# Altium PCB MagControl.PcbDoc (part 2 of 2)
Units mil, origin at the board's own origin, x right, y up, seen from the top; angles counter-clockwise.
Board outline 3700 x 2900 mil, 4 copper layers (Top Layer, Layer 1, Layer 2, Bottom Layer), stack 61.756 mil thick; 68 components, 51 nets, 337 pads, 112 vias.
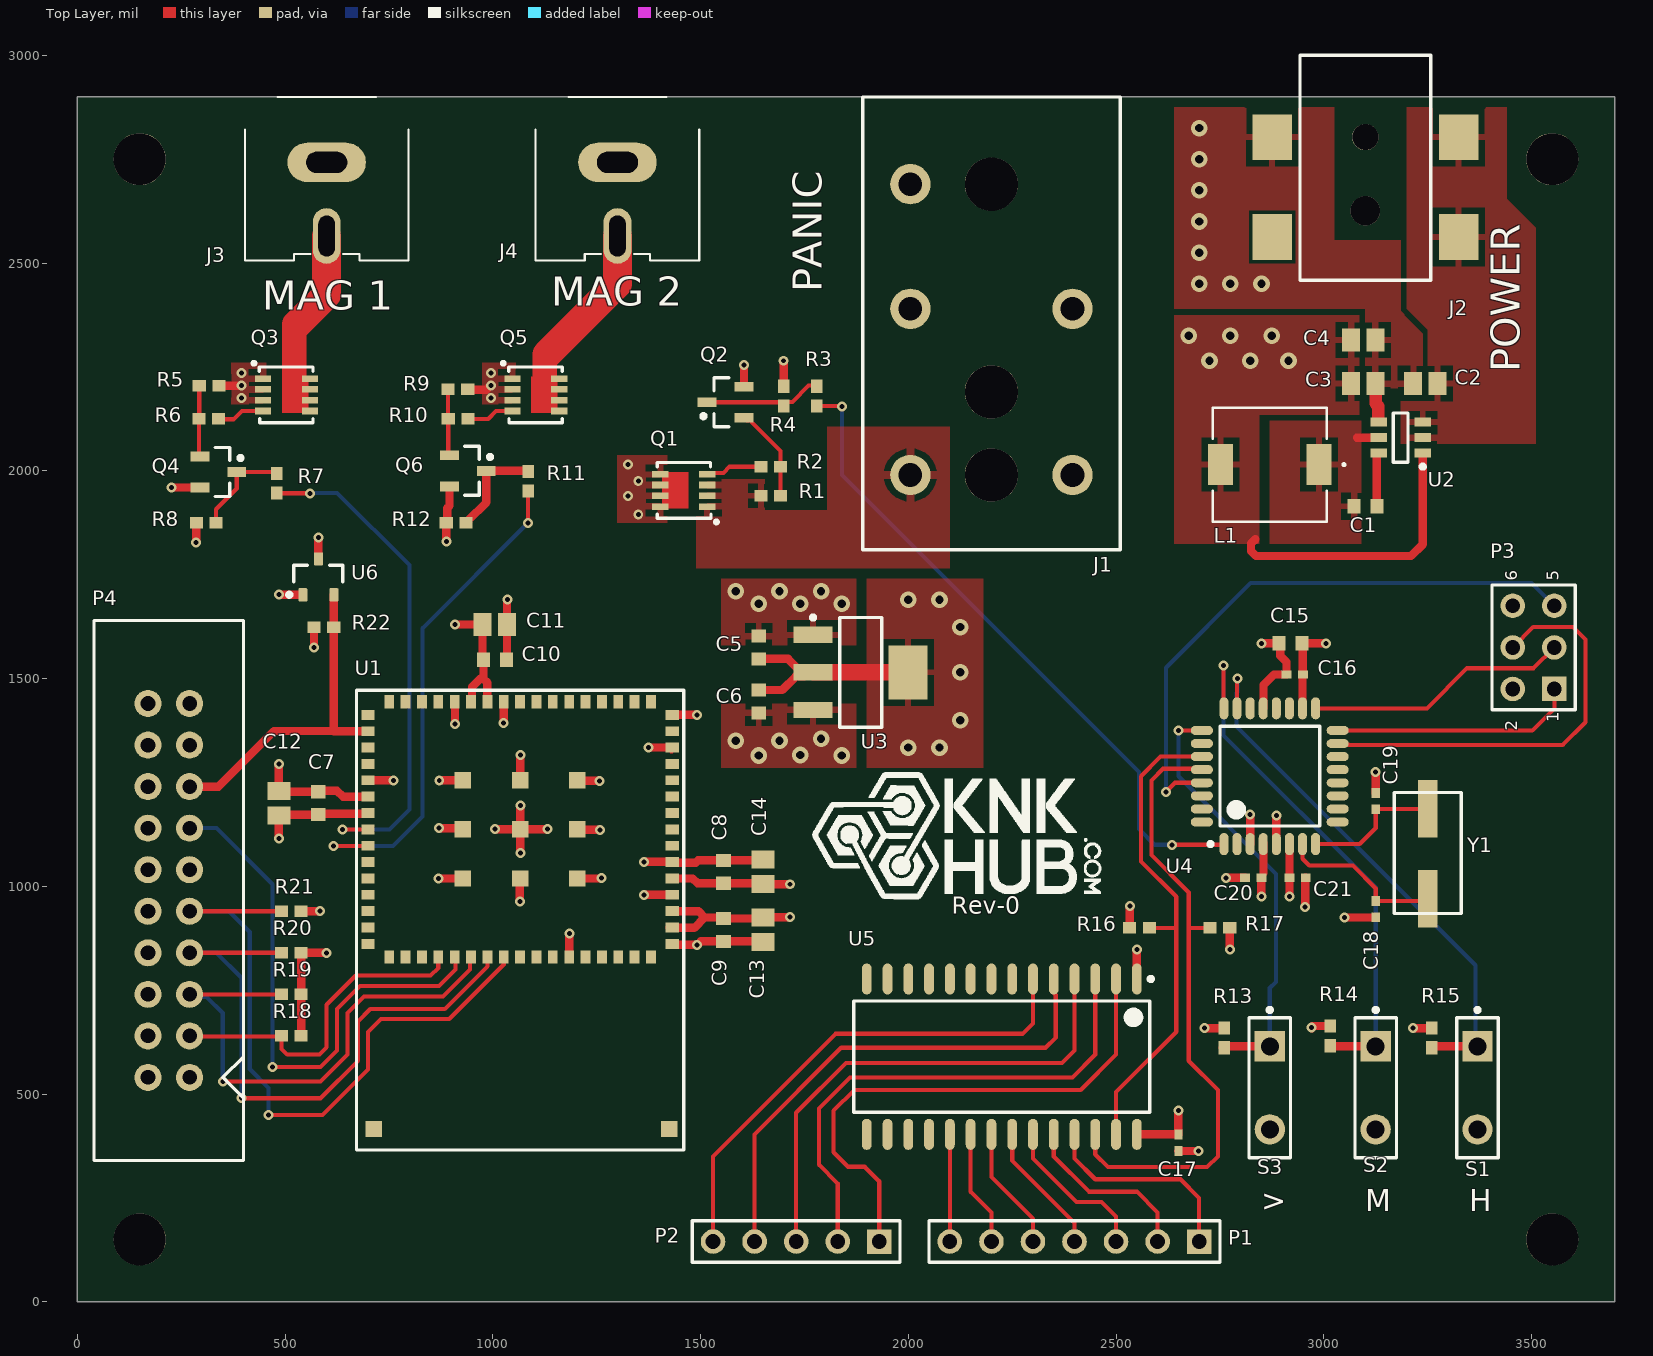
[diagram p0: Top Layer view]

## Part data (continued)
R18 R19 R20 R21 R22: library part R, "RES 1.00K OHM 1/10W 1% 0402 SMD", Case/Package=0402, Case Code (Metric)=1005, Manufacturer 1=Panasonic, Manufacturer Part Number 1=ERJ-2RKF1002X, Max Operating Temperature=155°C, Max Power Dissipation=100mW, Min Operating Temperature=-55°C, Package Quantity=1, Resistance=10kR, Supplier Part Number 1=P10.0KLCT-ND, Temperature Coefficient=100ppm/°C, Tolerance=1%, Voltage Rating=50V, Case Code (Imperial)=0402, ComponentLink1Description=https://datasheet.ciiva.com/11821/0900766b80f80784-11821171.pdf?src-supplier=RSComponents, ComponentLink1URL=https://datasheet.ciiva.com/11821/0900766b80f80784-11821171.pdf?src-supplier=RSComponents, ComponentLink2Description=https://datasheet.ciiva.com/17212/aoa0000ce2-17212102.pdf?src-supplier=Avnet+Europe, ComponentLink2URL=https://datasheet.ciiva.com/17212/aoa0000ce2-17212102.pdf?src-supplier=Avnet+Europe, ComponentLink3Description=https://datasheet.ciiva.com/28514/1678782-28514185.pdf?src-supplier=Element14, ComponentLink3URL=https://datasheet.ciiva.com/28514/1678782-28514185.pdf?src-supplier=Element14, ComponentLink4Description=https://datasheet.ciiva.com/43467/1678782-43467402.pdf?src-supplier=Farnell, ComponentLink4URL=https://datasheet.ciiva.com/43467/1678782-43467402.pdf?src-supplier=Farnell, ComponentLink5Description=https://datasheet.ciiva.com/27055/1987020-27055643.pdf?src-supplier=Jameco, ComponentLink5URL=https://datasheet.ciiva.com/27055/1987020-27055643.pdf?src-supplier=Jameco, ComponentLink6Description=https://datasheet.ciiva.com/48531/aoa0000ce2-48531069.pdf?src-supplier=Avnet, ComponentLink6URL=https://datasheet.ciiva.com/48531/aoa0000ce2-48531069.pdf?src-supplier=Avnet, ComponentLink7Description=https://datasheet.ciiva.com/30201/aoa0000ce2-30201022.pdf?src-supplier=Onlinecomponents.com, ComponentLink7URL=https://datasheet.ciiva.com/30201/aoa0000ce2-30201022.pdf?src-supplier=Onlinecomponents.com, ComponentLink8Description=https://datasheet.ciiva.com/16199/aoa0000ce2-16199478.pdf?src-supplier=Future+Electronics, ComponentLink8URL=https://datasheet.ciiva.com/16199/aoa0000ce2-16199478.pdf?src-supplier=Future+Electronics, ComponentLink9Description=https://datasheet.ciiva.com/24023/aoa0000ce2-24023017.pdf?src-supplier=Mouser, ComponentLink9URL=https://datasheet.ciiva.com/24023/aoa0000ce2-24023017.pdf?src-supplier=Mouser, ComponentLink10Description=https://datasheet.ciiva.com/9194/aoa0000ce2-9194142.pdf?src-supplier=Avnet, ComponentLink10URL=https://datasheet.ciiva.com/9194/aoa0000ce2-9194142.pdf?src-supplier=Avnet, ComponentLink11Description=https://datasheet.ciiva.com/16782/70260748-16782590.pdf?src-supplier=Allied+Electronics, ComponentLink11URL=https://datasheet.ciiva.com/16782/70260748-16782590.pdf?src-supplier=Allied+Electronics, ComponentLink12Description=https://datasheet.ciiva.com/16786/70260748-16786734.pdf?src-supplier=Allied+Electronics, ComponentLink12URL=https://datasheet.ciiva.com/16786/70260748-16786734.pdf?src-supplier=Allied+Electronics, Composition="Thick Film", Contact Plating=Tin, Depth=0.5mm, Features="Automotive AEC-Q200", Height=0.35mm, Lead Free="Lead Free", Length=1mm, Military Standard=Not, Mount="Surface Mount", Number of Pins=2, Number of Terminations=2, Packaging="Tape and Reel", Power Rating=100mW, Radiation Hardening=No, REACH SVHC="No SVHC", Supplier 1=Digi-Key, Termination=SMD/SMT, Voltage Rating (DC)=50V, Width=0.02inch
S1 S2 S3: library part SW-PB, "Switch", LatestRevisionDate=17-Jul-2002, LatestRevisionNote="Re-released for DXP Platform.", PackageDescription="Switch; 2 Leads", PackageReference=SPST-2, Published=24-Mar-1999, Publisher="Altium Limited"
U1: library part PARTICLE_P1, "P1 WI-FI MODULE", Manufacturer 1=Particle, Manufacturer Part Number 1=P1REEL, Supplier Part Number 1=1878-1020-1-ND, Supplier 1=Digi-Key
U2: library part AP63205, "IC REG BUCK 5V 2A TSOT26", Manufacturer 1=Diodes, Manufacturer Part Number 1=AP63205WU-7, Supplier Part Number 1=AP63205WU-7DICT-ND, Supplier 1=Digi-Key
U3: library part LM3940, "IC REG LDO 1A 5V SOT-223", Case/Package=SOT-223, Dropout Voltage=500mV, Manufacturer 1="TI National Semiconductor", Manufacturer Part Number 1=LM3940IMPX-3.3/NOPB, Max Input Voltage=7.5V, Max Operating Temperature=125°C, Max Output Current=1A, Min Input Voltage=4.5V, Min Operating Temperature=-40°C, Output Voltage=3.3V, Package Quantity=2000, Quiescent Current=15mA, Supplier Part Number 1=LM3940IMPX-3.3/NOPBCT-ND, ComponentLink1Description=https://datasheet.ciiva.com/12956/snvs114d-80171-12956736.pdf?src-supplier=Mouser, ComponentLink1URL=https://datasheet.ciiva.com/12956/snvs114d-80171-12956736.pdf?src-supplier=Mouser, ComponentLink2Description=https://datasheet.ciiva.com/27051/1282919-27051818.pdf?src-supplier=Jameco, ComponentLink2URL=https://datasheet.ciiva.com/27051/1282919-27051818.pdf?src-supplier=Jameco, ComponentLink3Description=https://datasheet.ciiva.com/3225/lm3940-3225415.pdf?src-supplier=Avnet, ComponentLink3URL=https://datasheet.ciiva.com/3225/lm3940-3225415.pdf?src-supplier=Avnet, ComponentLink4Description=https://datasheet.ciiva.com/6591/lm3940-6591738.pdf?src-supplier=Digi-Key, ComponentLink4URL=https://datasheet.ciiva.com/6591/lm3940-6591738.pdf?src-supplier=Digi-Key, ComponentLink5Description=https://datasheet.ciiva.com/26811/getdatasheetpartid-127471-26811034.pdf?src-supplier=Verical, ComponentLink5URL=https://datasheet.ciiva.com/26811/getdatasheetpartid-127471-26811034.pdf?src-supplier=Verical, ComponentLink6Description=https://datasheet.ciiva.com/6591/lm3940-6591740.pdf?src-supplier=Digi-Key, ComponentLink6URL=https://datasheet.ciiva.com/6591/lm3940-6591740.pdf?src-supplier=Digi-Key, ComponentLink7Description=https://datasheet.ciiva.com/6591/lm3940-6591742.pdf?src-supplier=Digi-Key, ComponentLink7URL=https://datasheet.ciiva.com/6591/lm3940-6591742.pdf?src-supplier=Digi-Key, Contact Plating=Tin, Lead Free="Lead Free", Mount="Surface Mount", Number of Outputs=1, Number of Pins=4, Number of Regulators=1, Output Current=1A, Output Type=Fixed, Packaging="Tape and Reel", Polarity=Positive, Radiation Hardening=No, Supplier 1=Digi-Key
U4: library part CMP-0095-00269-2, "8-bit AVR Microcontroller, 32KB Flash, 1KB EEPROM, 2KB SRAM, 32-pin TQFP, Industrial Grade (-40°C to 85°C)", Case/Package=A, Frequency=20MHz, Manufacturer 1="Microchip / Atmel", Manufacturer Part Number 1=ATMEGA328P-AU, Max Operating Temperature=85°C, Max Supply Voltage=5.5V, Min Operating Temperature=-40°C, Min Supply Voltage=1.8V, Package Quantity=250, Supplier Part Number 1=ATMEGA328P-AU-ND, Code_JEDEC=MS-026-ABA, ComponentLink1Description="Manufacturer URL", ComponentLink1URL=http://www.atmel.com/, ComponentLink2Description="ATmega48A/48PA/88A/88PA/168A/168PA/328/328P Datasheet", ComponentLink2URL=http://www.atmel.com/dyn/resources/prod_documents/doc8271.pdf, ComponentLink3Description="ATmega48A/48PA/88A/88PA/168A/168PA/328/328P Summary", ComponentLink3URL=http://www.atmel.com/dyn/resources/prod_documents/8271S.pdf, ComponentLink4Description=https://datasheet.ciiva.com/1166/doc8161-1166860.pdf?src-supplier=Newark, ComponentLink4URL=https://datasheet.ciiva.com/1166/doc8161-1166860.pdf?src-supplier=Newark, ComponentLink5Description=https://datasheet.ciiva.com/29119/155196-da-01-en-microcontr-atmega328p-au-8bit-tqfp-32-29119594.pdf?src-supplier=Conrad, ComponentLink5URL=https://datasheet.ciiva.com/29119/155196-da-01-en-microcontr-atmega328p-au-8bit-tqfp-32-29119594.pdf?src-supplier=Conrad, ComponentLink6Description=https://datasheet.ciiva.com/15213/getdatasheetpartid-365828-15213131.pdf?src-supplier=Verical, ComponentLink6URL=https://datasheet.ciiva.com/15213/getdatasheetpartid-365828-15213131.pdf?src-supplier=Verical, ComponentLink7Description=https://datasheet.ciiva.com/1157/1693866-1157693.pdf?src-supplier=Element14, ComponentLink7URL=https://datasheet.ciiva.com/1157/1693866-1157693.pdf?src-supplier=Element14, Core Architecture=AVR, Data Bus Width=8b, DatasheetVersion="revD, May-2011", Height=1.05mm, Interface=I2C, Lead Free="Lead Free", Length=7mm, Max Frequency=20MHz, Memory Size=32KB, Memory Type=FLASH, Mount="Surface Mount", Number of ADC Channels=8, Number of I2C Channels=1, Number of I/Os=23, Number of Pins=32, Number of Programmable I/O=23, Number of PWM Channels=6, Number of SPI Channels=1, Number of Timers/Counters=3, Oscillator Type=Internal, PackageDescription="32-Lead, 7x7x1.0 mm Body, 0.8mm Lead Pitch, Thin Profile Plastic Quad Flat Package (TQFP)", PackageReference=32A, PackageVersion="revC, Oct-2010", Packaging=Tray, Peripherals="Brown-out Detect/Reset", Radiation Hardening=No, RAM Size=2KB, REACH SVHC="No SVHC", RevisionNote="DatasheetVersion & PackageVersion updated. URLs added.", Supplier 1=Digi-Key, Watchdog Timer=Yes, Width=7mm
U5: library part HT16K33_28, "LED Matrix Driver"
U6: library part TLV803SDBZR, "Voltage Supervisor with Active-Low, Open Drain Reset, 1 Supply Monitored, -40 to 125 degC, 3-pin SOT-23 (DBZ), Green (RoHS & no Sb/Br)", Case/Package=SOT-23, Manufacturer="Texas Instruments", Max Operating Temperature=125°C, Max Reset Threshold Voltage=2.99V, Max Supply Current=30uA, Max Supply Voltage=6V, Min Operating Temperature=-40°C, Min Reset Threshold Voltage=2.87V, Min Supply Voltage=1.1V, Number of Voltages Monitored=1, Operating Supply Current=20uA, Quiescent Current=9uA, Rating=Catalog, Supplier Part Number 1=296-29196-1-ND, Threshold Voltage=2.93V, Threshold Voltage 1 (typ)(Typ)(V)=2.93, # of Supplies Monitored=1, Code_JEDEC=TO-236-AB, ComponentLink1Description=Datasheet, ComponentLink1URL=http://www.ti.com/general/docs/lit/getliterature.tsp?genericPartNumber=TLV803S&fileType=pdf, ComponentLink2Description=https://datasheet.ciiva.com/15105/getdatasheetpartid-544055-15105605.pdf?src-supplier=Verical, ComponentLink2URL=https://datasheet.ciiva.com/15105/getdatasheetpartid-544055-15105605.pdf?src-supplier=Verical, ComponentLink3Description=https://datasheet.ciiva.com/14203/tlv863m-14203548.pdf?src-supplier=Avnet, ComponentLink3URL=https://datasheet.ciiva.com/14203/tlv863m-14203548.pdf?src-supplier=Avnet, ComponentLink4Description=https://datasheet.ciiva.com/1979/tlv803m-1979837.pdf?src-supplier=Digi-Key, ComponentLink4URL=https://datasheet.ciiva.com/1979/tlv803m-1979837.pdf?src-supplier=Digi-Key, ComponentLink5Description=https://datasheet.ciiva.com/1979/tlv803m-1979838.pdf?src-supplier=Digi-Key, ComponentLink5URL=https://datasheet.ciiva.com/1979/tlv803m-1979838.pdf?src-supplier=Digi-Key, ComponentLink6Description=https://datasheet.ciiva.com/1979/tlv803m-1979839.pdf?src-supplier=Digi-Key, ComponentLink6URL=https://datasheet.ciiva.com/1979/tlv803m-1979839.pdf?src-supplier=Digi-Key, ComponentLink7Description=https://datasheet.ciiva.com/26070/sbvs157b-26070047.pdf?src-supplier=Avnet+Europe, ComponentLink7URL=https://datasheet.ciiva.com/26070/sbvs157b-26070047.pdf?src-supplier=Avnet+Europe, DatasheetVersion=SBVS157B, Iq(Typ)(uA)=9, Lead Free="Lead Free", Manufacturer 1="Texas Instruments", Manufacturer Part Number 1=TLV803SDBZR, Mount="Surface Mount", Mounting Technology="Surface Mount", Nominal Supply Current=30uA, Number of Elements=1, Number of Pins=3, Output Driver Type / Reset Output="Active-low, Open-drain", PackageDescription="3-Pin Plastic Small-Outline Package, 0.95 mm Pitch, 2.4 mm Lead Span", Package Quantity=1, PackageReference=DBZ0003A, PackageVersion="revB, Apr-2005", Packaging="Tape and Reel", PartNumber=TLV803SDBZR, Pricing 1="1=0.61000, 10=0.53400, 100=0.40910, 500=0.32342, 1000=0.25874 (USD)", Radiation Hardening=No, REACH SVHC="No SVHC", Reset="Active Low", Reset Threshold Accuracy(%)=2, Reset Timeout=120ms, RoHS=Yes, Stock 1=66193, SubFamily="Supervisor and Reset IC", Supplier 1=Digi-Key, Time Delay(ms)=200, Type="Simple Reset/Power-On Reset", VCC(Max)(V)=6, VCC(Min)(V)=1.1, Watchdog Timer=No
Y1: library part CRYSTAL, "CRYSTAL", ESR (Equivalent Series Resistance)=50R, Frequency=16MHz, Frequency Stability=50ppm, Frequency Tolerance=30ppm, Load Capacitance=20pF, Manufacturer 1="ECS International", Manufacturer Part Number 1=ECS-160-20-3X-EN-TR, Max Operating Temperature=85°C, Min Operating Temperature=-40°C, Package Quantity=1, Supplier Part Number 1=XC1793CT-ND, ComponentLink1Description=https://datasheet.ciiva.com/852/csm-3x-852506.pdf?src-supplier=Digi-Key, ComponentLink1URL=https://datasheet.ciiva.com/852/csm-3x-852506.pdf?src-supplier=Digi-Key, ComponentLink2Description=https://datasheet.ciiva.com/852/csm-3x-852507.pdf?src-supplier=Digi-Key, ComponentLink2URL=https://datasheet.ciiva.com/852/csm-3x-852507.pdf?src-supplier=Digi-Key, ComponentLink3Description=https://datasheet.ciiva.com/852/csm-3x-852508.pdf?src-supplier=Digi-Key, ComponentLink3URL=https://datasheet.ciiva.com/852/csm-3x-852508.pdf?src-supplier=Digi-Key, Height=0.091inch, Lead Free="Lead Free", Length=0.276inch, Mount="Surface Mount", Packaging="Tape and Reel", Supplier 1=Digi-Key, Termination=SMD/SMT, Tolerance=30ppm, Width=0.161inch

## Free pads (board coordinates)
  round 125 hole 125 unplated: ""(150,150) ""(150,2750) ""(3550,150) ""(3550,2750)

## Via types
v1: diameter 24, hole 12, Top Layer to Bottom Layer, 79 vias
v2: diameter 40, hole 20, Top Layer to Bottom Layer, 33 vias

## Nets (pads, with @x,y where several pads share a name; then routed paths per layer and width w, separated by ;. In a path a pad name is that pad's centre, name@x,y a point inside that pad or via, vN(x,y) a via of type N, cw(c..) or ccw(c..) an arc to the next point about the centre after c; other vN are vias at no path point)
3V3: C6.2 C7.2 C8.2 C9.2 C10.2 C11.2 C12.2 C13.2 C14.2 P4.1 R18.2 R19.2 R20.2 R22.2 U1.2 U1.3 U1.5 U1.26 U1.27 U1.38 U3.3 U6.3 | length 1662.8
  Top Layer w20: v1(485,1294.57) C12.2 486.97,1227.56 C7.2 582.44,1230 625,1230 639.17,1215.83 U1.38 ; R18.2 R19.2 R20.2 v1(600,840) ; R22.2 569.76,1575.24 v1(570,1575) ; U6.3 v1(580,1840) ; v1(909,1630) C11.2 975,1547.44 C10.2 977.44,1499.45 ; U1.27 949.17,1444.17 950,1445 950,1480 969.45,1499.45 977.44,1499.45 ; U1.26 986.89,1490 977.44,1499.45 ; U1.2 1425.87,900.87 1425,900 1485,900 1510,925 ; U1.3 1494.76,940.24 1510,925 ; U1.5 1481.02,1018.98 1492.56,1007.44 C8.2 1648.03,1007.44 C14.2 1650.47,1005 v1(1715,1005) ; v1(1715,925.63) 1650.63,925.63 C13.2 1647.56,922.56 C9.2 1552.56,925 1510,925
  other v2: 1640,1315 1840,1315 1740,1316 1585,1350 1690,1350 1790,1355
5V: C3.2 C4.2 C5.2 C15.2 C16.2 C17.2 C20.2 C21.2 J1.S L1.2 P3.2 R16.2 R17.2 S1.2 S2.2 S3.2 U2.1 U3.1 U4.4 U4.6 U4.18 U5.28 | length 1411.5
  Top Layer w20: R16.2 2532,900 2535,903 2533,905 v1(2533,953) ; U5.28 C17.2@2649.84,402.99 ; C17.2 2650,402.83 C17.2@2649.84,402.99 ; v1(2650,460) 2649.84,459.84 C17.2@2649.84,402.99 ; R17.2 2773.62,848.38 v1(2774,848) ; 2835,1835 2825,1825 2825,1806.72 2836.72,1795 3210,1795 3238.15,1823.15 U2.1 ; C20.2 2849.69,975.31 v1(2850,975) ; U4.4 2854.25,1104.25 U4.4@2854.57,1104.57 ; 2855,1032.11 2855,1083.95 2854.57,1084.38 U4.4@2854.57,1104.57 ; U4.4@2855,1105 U4.4@2854.57,1104.57 ; v1(2917.24,975) C21.2 U4.6 ; U4.18 2948.74,1509.84 2948.9,1510 C16.2 2949.69,1582.87 C15.2 v1(3005,1585)
  other v2: 1640,1680 1740,1680 1840,1680 1585,1710 1690,1710 1790,1710 2725,2265 2822.76,2265 2915,2265 2675,2325 2775,2325 2875,2325
12V: C2.2 J2.1 U2.2 U2.3
GND: C2.1 C3.1 C4.1 C5.1 C6.1 C7.1 C8.1 C9.1 C10.1 C11.1 C12.1 C13.1 C14.1 C15.1 C16.1 C17.1 C18.1 C19.1 C20.1 C21.1 J2.2 J3.1 J4.1 P3.6 P4.4 P4.6 P4.8 P4.10 P4.11 P4.12 P4.14 P4.16 P4.18 P4.20 Q2.2 Q4.2 Q6.2 R4.1 R8.1 R12.1 R13.1 R14.1 R15.1 R21.2 U1.1 U1.4 U1.6 U1.13 U1.15 U1.25 U1.28 U1.37 U1.39 U1.59 U1.65 U1.66 U1.67 U1.68 U1.69 U1.70 U1.71 U1.72 U1.73 U2.4 U3.2 U3.4 U4.3 U4.5 U4.21 U5.1 U6.1 | length 4017.9
  Top Layer w20: v1(226,1960) Q4.2 ; v1(286,1827) 286.38,1827.38 R8.1 ; v1(485,1115) C12.1 ; v1(485,1702) 485.31,1701.69 U6.1 ; R21.2 583.76,940 v1(584,940.24) ; U1.39 698.03,1175 582.56,1175 C7.1 486.97,1172.44 C12.1 ; U1.37 760.8,1255.2 v1(761,1255) ; v1(868.78,1018.98) U1.71 ; v1(870,1140) 928,1140 927.83,1139.83 U1.72 ; v1(871,1255.2) U1.73 ; v1(888,1830) 887.76,1830.24 R12.1 890,1877.24 890,1910 895.71,1915.71 Q6.2 ; U1.28 909,1443.32 v1(909,1391) ; v1(1005,1138) 1005.91,1137.09 U1.69 ; v1(1026,1393) 1026.26,1393.26 U1.25 ; C10.1 1034.06,1546.5 C11.1 1034.06,1689.06 v1(1035,1690) ; v1(1065,964) 1065,1009 1065.63,1009.63 U1.68 ; U1.70 1065.63,1315.63 v1(1066,1316) ; v1(1066,1080) 1066,1131.46 1065,1132.46 1066,1133.46 1064,1135.46 U1.69 ; v1(1066,1195) 1066,1142.72 1063,1139.72 U1.69 ; v1(1132,1138) 1131.09,1137.09 U1.69 ; U1.59 1183.74,886.74 v1(1184,887) ; U1.65 1259.98,1018.98 v1(1261,1020) ; U1.66 1204.51,1136 v1(1258,1136) ; U1.67 1204.62,1254 v1(1257,1254) ; v1(1364,979.61) U1.4 ; v1(1364,1059) 1431.12,1059 U1.6 1433.12,1057 1488,1057 1493.56,1062.56 C8.1 1648.03,1062.56 C14.1 ; v1(1375,1333.94) 1426.06,1333.94 1430,1330 1431.77,1331.77 U1.13 ; U1.1 1433.58,859.69 1441.31,859.69 1442,859 v1(1491,859) 1492.08,859 1500.52,867.44 C9.1 1648.5,867.44 C13.1 ; U1.15 v1(1491,1412.68) ; Q2.2 1604.29,2254.29 v1(1605,2255) ; C6.1 1696.56,1472.56 1729.31,1505.31 1749.31,1505.31 U3.2@1759,1515 ; C5.1 1710.83,1547.44 1733.58,1524.69 1738,1524.69 1747.69,1515 U3.2@1759,1515 ; R4.1 v1(1700,2265) ; U3.2 U3.2@1759,1515 ; U5.1 v1(2550,848) ; C17.1 2698.19,363 v1(2698.5,362.68) ; v1(2713.15,658.62) R13.1 ; v1(2765,1020) 2765.55,1020.55 C20.1 ; U4.3 v1(2822.76,1172.44) ; v1(2849.69,1585) C15.1 2895,1582.44 2895,1555 2910.32,1539.68 C16.1 2880,1510 2855,1485 2855,1446.05 2854.57,1445.62 2854.57,1444.61 2855,1444.17 2855,1429.13 U4.21 ; U4.5 v1(2885.75,1170.47) ; v1(2955,950) 2955,1020.39 2955.16,1020.55 C21.1 ; v1(2970,660) v1@2971.38,658.62 ; v1@2971.38,663.62 R14.1 ; v1(3050,925) 3123.9,925 3124.53,925.63 C18.1 ; v1(3124.53,1275) 3125,1274.53 C19.1 ; U2.4@3131,2124 3131.85,2123.15 U2.4 ; v1(3215,658.62) R15.1 ; C12.1 485,1172 C12.1
  Top Layer w30: C3.1 3124.53,2162.47 3131,2156 U2.4@3131,2124
  Top Layer w40: U3.2 U3.4
  other v2: 2000,1333.94 2075,1333.94 2125,1400 2125,1515 2125,1624 2000,1690 2075,1690 2700,2450 2775,2450 2850,2450 2700,2525 2700,2600 2700,2675 2700,2750 2700,2825
MAG1: R7.1 U1.40 | length 1222
  Top Layer w10: R7.1 480.38,1946 v1(560,1946) ; v1(638,1137.09) U1.40
  Bottom Layer w10: v1(560,1946) 561,1947 625,1947 799,1773 799,1185 751.09,1137.09 v1(638,1137.09)
MAG2: R11.1 U1.41 | length 1216.8
  Top Layer w10: v1(616,1097) 698.77,1097 U1.41 ; v1(1085,1875) R11.1
  Bottom Layer w10: v1(616,1097) 760,1097 831,1168 831,1621 v1(1085,1875)
MISO: P3.1 U4.16 | length 590.2
  Top Layer w10: U4.16 3501.85,1375.24 3555,1428.39 P3.1
MOSI: P3.4 U4.15 | length 1033.8
  Top Layer w10: U4.15@3030,1340 U4.15@3031.51,1341.51 ; U4.15 3033.39,1343.39 U4.15@3031.51,1341.51 ; P3.4 3504,1624 3600,1624 3630,1594 3630,1395 3575,1340 3060.82,1340 3059.31,1341.51 U4.15@3031.51,1341.51
NetC1_1: C1.1 L1.1 U2.5 | length 51.9
  Top Layer w20: 3080,2080 U2.5
NetC1_2: C1.2 U2.6 | length 131.4
  Top Layer w20: C1.2 3127.56,2041.77 3128.39,2042.6 U2.6
NetC18_2: C18.2 U4.7 Y1.1 | length 398.2
  Top Layer w10: U4.7 2948.74,1066.26 2965,1050 3070,1050 3125,995 C18.2 3245,965 Y1.1
NetC19_2: C19.2 U4.8 Y1.2 | length 331.5
  Top Layer w10: U4.8 3086.61,1101.61 3125,1140 C19.2 3125.95,1186.26 3249.72,1186.26 Y1.2
NetJ1_T: J1.T Q1.1 Q1.2 Q1.3 R1.2
NetJ3_2: J3.2 Q3.5 Q3.6 Q3.7 Q3.8 | length 384.7
  Top Layer w60: 522,2213 522,2346 528,2352
  Top Layer w70: 528,2352 600,2424 J3.2
NetJ4_2: J4.2 Q5.5 Q5.6 Q5.7 Q5.8 | length 427.8
  Top Layer w60: 1125,2210 1125,2275 1130,2280
  Top Layer w70: 1130,2280 1300,2450 J4.2
NetP1_1: P1.1 U5.25 | length 502.3
  Top Layer w10: U5.25 2400,345 2450,295 2655,295 2700,250 P1.1
NetP1_2: P1.2 U5.24 | length 428.9
  Top Layer w10: U5.24 2350,350 2435,265 2550,265 2600,215 P1.2
NetP1_3: P1.3 U5.23 | length 376
  Top Layer w10: U5.23 2300,345 2405,240 2465,240 2500,205 P1.3
NetP1_4: P1.4 U5.22 | length 320.1
  Top Layer w10: U5.22 2250,340 2400,190 P1.4
NetP1_5: P1.5 U5.21 | length 299.4
  Top Layer w10: U5.21 2200,300 2300,200 P1.5
NetP1_6: P1.6 U5.20 | length 278.7
  Top Layer w10: U5.20 2150,265 2200,215 P1.6
NetP1_7: P1.7 U5.19 | length 258
  Top Layer w10: P1.7 U5.19
NetP2_1: P2.1 U5.2 | length 1301.9
  Top Layer w10: P2.1 1930,290 1895,325 1855,325 1820,360 1820,460 1870,510 2415,510 2500,595 U5.2
NetP2_2: P2.2 U5.3 | length 1239.5
  Top Layer w10: P2.2 1830,285 1785,330 1785,465 1860,540 2395,540 2450,595 U5.3
NetP2_3: P2.3 U5.4 | length 1214.1
  Top Layer w10: P2.3 1730,455 1850,575 2370,575 2400,605 U5.4
NetP2_4: P2.4 U5.5 | length 1224.3
  Top Layer w10: P2.4 1630,402.99 1838.39,611.38 2330,611.38 2355,636.38 2355,738.75 2352.61,741.14 2352.61,767.61 2355,770 2350,775 U5.5
NetP2_5: P2.5 U5.6 | length 1214.6
  Top Layer w10: P2.5 1530,350 1825,645 2275,645 2300,670 U5.6
NetQ1_4: Q1.4 R2.2 | length 136.5
  Top Layer w10: Q1.4 1519,1995 1555,1995 1570,2010 R2.2
NetQ1_5: Q1.5 Q1.6 Q1.7 Q1.8 Q3.1 Q3.2 Q3.3 Q5.1 Q5.2 Q5.3 R5.2 R9.2 | length 115.9
  Top Layer w10: R9.2@940,2195 R9.2@940.36,2194.64 ; Q5.2@1045.64,2194.64 Q5.2
  Top Layer w20: R5.2 v1(395,2205) ; R9.2@940,2195 983.92,2195 993.92,2205 v1(995,2205)
  other v1: 1350,1895 1325,1940 1350,1975 1325,2015 395,2175 995,2175 395,2235 995,2235
NetQ2_1: Q2.1 R3.2 R4.2 | length 289.1
  Top Layer w10: Q2.1 1691.38,2165 R4.2 1700,2157.28 1708.78,2166.06 1721.06,2166.06 1760,2205 1778.62,2205 R3.2
NetQ2_3: Q2.3 R1.1 R2.1 | length 228.8
  Top Layer w10: Q2.3 1611.1,2120.79 1619.21,2120.79 1692.24,2047.76 R2.1 R1.1
NetQ3_4: Q3.4 R6.2 | length 115.7
  Top Layer w10: R6.2 341,2124 376,2124 396,2144 Q3.4
NetQ4_1: Q4.1 R7.2 R8.2 | length 241.1
  Top Layer w10: R8.2 333.62,1907.62 383.58,1957.58 Q4.1 476.22,1997.4 R7.2
NetQ4_3: Q4.3 R5.1 R6.1 | length 171.7
  Top Layer w10: R5.1 293.38,2126.38 292.38,2125.38 R6.1 292.76,2037.05 Q4.3
NetQ5_4: Q5.4 R10.2 | length 114.9
  Top Layer w10: R10.2 989,2125 1008,2144 Q5.4
NetQ6_1: Q6.1 R11.2 R12.2 | length 247.8
  Top Layer w20: R12.2 936.97,1875 940.75,1878.78 940.75,1880.75 984.29,1924.29 Q6.1 1083.62,2000 R11.2
NetQ6_3: Q6.3 R9.1 R10.1 | length 160
  Top Layer w10: R9.1 892.38,2125.38 R10.1 892.76,2040.35 Q6.3
NetR13_2: R13.2 S3.1 U4.25 | length 1041.8
  Top Layer w10: v1(2650,1375) 2708,1375 2707.76,1375.24 U4.25
  Top Layer w20: R13.2 2756.38,611.38 2760,615 S3.1
  Bottom Layer w10: v1(2650,1375) 2650,1265 2885,1030 2885,770 2870,755 S3.1
NetR14_2: R14.2 S2.1 U4.24 | length 1281.2
  Top Layer w10: v1(2759,1531) 2759,1429 2759.61,1428.39 U4.24
  Top Layer w20: R14.2 3016.38,615 S2.1
  Bottom Layer w10: v1(2759,1531) 2759,1363.09 3125,997.09 S2.1
NetR15_2: R15.2 S1.1 U4.23 | length 1309.5
  Top Layer w10: U4.23 2791.26,1499.26 v1(2792,1500)
  Top Layer w20: R15.2 3263.62,615 S1.1
  Bottom Layer w10: v1(2792,1500) 2792,1467 2790,1465 2790,1385 3365,810 3365,620 S1.1
nRESET: P3.5 U4.29 | length 1436.3
  Top Layer w10: v1(2620,1227.56) 2641.69,1249.25 U4.29
  Bottom Layer w10: v1(2620,1227.56) 2620,1526 2824,1730 3500,1730 P3.5
POWER_EN: R3.1 U4.1 | length 1594.9
  Top Layer w10: R3.1 1838.62,2156.38 v1(1840,2155) ; v1(2635,1100) 2758.15,1100 U4.1
  Bottom Layer w10: v1(1840,2155) 1840,1990 2555,1275 2555,1138 2593,1100 v1(2635,1100)
RSTn: P4.15 R22.1 U1.34 U6.2 | length 813.2
  Top Layer w20: P4.15 339.62,1240 473.33,1373.71 617,1373.71 ; U6.2 617,1701.29 R22.1 617,1373.71 ; U1.34 617.4,1373.31 617,1373.71
SCK: P3.3 U4.17 | length 635.5
  Top Layer w10: U4.17 3248.39,1428.39 3345,1525 3505,1525 P3.3
SCL: R17.1 U4.28 U5.26 | length 1523.3
  Top Layer w10: U5.26 2450,355 2480.86,324.14 2719.14,324.14 2745,350 2745,510 2675,580 2675,900 ; U4.28 2704.38,1282.98 2612.98,1282.98 2585,1255 2585,1075 2675,985 2675,900 ; R17.1 2675,900
SDA: R16.1 U4.27 U5.27 | length 1189.3
  Top Layer w10: U5.27 2500,505 2645,650 2645,902 ; R16.1 2643,900 2645,902 ; U4.27 2607.24,1312.24 2560,1265 2560,1060 2645,975 2645,902
TCK: P4.9 R21.1 U1.55 | length 1632.7
  Top Layer w10: P4.9 R21.1 ; v1(460,450) 590,450 699.49,559.49 699.49,649.49 730.59,680.59 895,680.59 1026.26,811.85 U1.55
  Bottom Layer w10: P4.9 365,940 415,890 415,560 460,515 v1(460,450)
TDI: P4.5 R19.1 U1.53 | length 1281.5
  Top Layer w10: P4.5 R19.1 ; v1(350,530) 585,530 650,595 650,695 690,735 880,735 945,800 945,820 947.52,822.52 U1.53
  Bottom Layer w10: P4.5 276.09,733.91 311.09,733.91 350,695 v1(350,530)
TDO: P4.13 U1.52 | length 1333.3
  Top Layer w10: v1(470,565) 585,565 625,605 625,705 679.96,759.96 870,759.96 910,799.96 910,819.25 901.34,819.25 908.15,826.06 U1.52
  Bottom Layer w10: P4.13 335,1140 470,1005 v1(470,565)
TMS: P4.7 R20.1 U1.54 | length 1462.8
  Top Layer w10: P4.7 R20.1 ; v1(395,490) 585,490 675,580 675,675 705,705 884.41,705 986.89,807.48 U1.54
  Bottom Layer w10: P4.7 335,840 395,780 v1(395,490)
TRST: P4.3 R18.1 U1.51 | length 807.7
  Top Layer w10: P4.3 271.38,638.62 R18.1@490,638.62 ; R18.1 491.38,608.62 505,595 582.5,595 600,612.5 600,715 670,785 850,785 868.78,803.78 U1.51
pads on no net: J1. J1.R J1.RB J1.TB J2.3 J2.NP P4.2 P4.17 P4.19 U1.7 U1.8 U1.9 U1.10 U1.11 U1.12 U1.14 U1.16 U1.17 U1.18 U1.19 U1.20 U1.21 U1.22 U1.23 U1.24 U1.29 U1.30 U1.31 U1.32 U1.33 U1.35 U1.36 U1.42 U1.43 U1.44 U1.45 U1.46 U1.47 U1.48 U1.49 U1.50 U1.56 U1.57 U1.58 U1.60 U1.61 U1.62 U1.63 U1.64 U1.74 U1.75 U4.2 U4.9 U4.10 U4.11 U4.12 U4.13 U4.14 U4.19 U4.20 U4.22 U4.26 U4.30 U4.31 U4.32 U5.7 U5.8 U5.9 U5.10 U5.11 U5.12 U5.13 U5.14 U5.15 U5.16 U5.17 U5.18
copper on no net: | length 5
  Top Layer w10: 829.41,825 829.41,830

## Polygon pours and split planes (outlines as drawn)
no net on Bottom Layer "Bottom Layer-No Net" (solid, pour order 16): 1545,1680
NetQ1_5 on Bottom Layer "Bottom Layer-NetQ1_5" (solid, pour order 0): 1300,2090 1300,1875 1470,1875 1470,2090 1470,2260 360,2260 360,2090
GND on Top Layer "Top Layer-GND" (solid, pour order 32): 1900,1740 1900,1285 2180,1285 2180,1740
NetQ1_5 on Top Layer "Top Layer-NetQ1_5" (solid, pour order 2): 455,2260 455,2160 370,2160 370,2260
NetJ1_T on Top Layer "Top Layer-NetJ1_T" (solid, pour order 30): 1490,1980 1490,1765 2100,1765 2100,2106 1805,2106 1805,1905 1655,1905 1655,1980
5V on Top Layer "Top Layer-5V" (solid, pour order 28): 1550,1580 1550,1740 1875,1740 1875,1580
3V3 on Top Layer "Top Layer-3V3" (solid, pour order 26): 1550,1440 1875,1440 1875,1285 1550,1285
GND on Top Layer "Top Layer-GND 1" (solid, pour order 14): 3100,2390 2640,2390 2640,2875 3025,2875 3025,2555 3185,2555 3185,2385 3193.15,2376.85 3193.15,2375 3238.15,2330 3238.15,2199 3150,2199 3150,2105 3100,2105
NetC1_1 on Top Layer "Top Layer-NetC1_1" (solid, pour order 12): 2870,2120 2870,1825 3090,1825 3090,2065 3090,2120
5V on Top Layer "Top Layer-5V 1" (solid, pour order 10): 2640,2375 3085,2375 3085,2135 2845,2135 2845,1825 2640,1825
12V on Top Layer "Top Layer-12V" (solid, pour order 8): 3185,2065 3510,2065 3510,2585 3440,2655 3440,2875 3200,2875 3200,2390 3250,2340 3250,2167 3185,2167
NetQ1_5 on Top Layer "Top Layer-NetQ1_5 1" (solid, pour order 6): 1420,2037.4 1300,2037.4 1300,1875 1420,1875
NetQ1_5 on Top Layer "Top Layer-NetQ1_5 2" (solid, pour order 4): 1055,2260 1055,2160 975,2160 975,2260
5V on Layer 2 "Layer 2-5V" (solid, pour order 24): 50,1905 50,2850 3650,2850 3650,50 1500,50 1500,800 1750.39,800 1930,979.61 1930,1550 1350,1550 995,1905
3V3 on Layer 2 "Layer 2-3V3" (solid, pour order 22): 50,50 50,1875 982,1875 1342,1515 1890,1515 1900,1515 1900,1000 1725,825 1475,825 625,825 625,50
GND on Layer 1 "Layer 1-GND" (solid, pour order 20): 50,2850 50,50 625,50 625,825 1500,825 1500,50 3650,50 3650,2850

## Silkscreen, mask and mechanical layers (free items; w line width, h text height)
Top Overlay:
  drawing of 19 lines, arcs and shapes, not listed
  text "PANIC" at 1815,2430 h120 r90
  text "MAG 2" at 1140,2375 h120
  text "MAG 1" at 445,2365 h120
  text "POWER" at 3495,2237 h120 r90
  text "Rev-0" at 2105,920 h70
  text ">" at 2849.69,200 h90
  text "M" at 3100,200 h90
  text "H" at 3350,200 h90
OUTLINE:
  the board outline again, w8

## Dimensions
0,0 to 0,2900 on DIM
3700,2900 to 0,2900 on DIM

## Text inside footprints (layer, text, board x,y; h text height)
P3: Top Overlay "1" at 3575,1395 h50 r90; Top Overlay "2" at 3475,1375 h50 r90; Top Overlay "5" at 3575,1735 h50 r90; Top Overlay "6" at 3475,1735 h50 r90